# Altium PCB NBP2 Altera Cyclone PQ208 Rev1.02.PcbDoc (part 2 of 2)
Units mm, origin at the board's own origin, x right, y up, seen from the top; angles counter-clockwise.
Board outline 69 x 80.99 mm, 2 copper layers (Top Layer, Bottom Layer); 52 components, 189 nets, 558 pads, 192 vias.
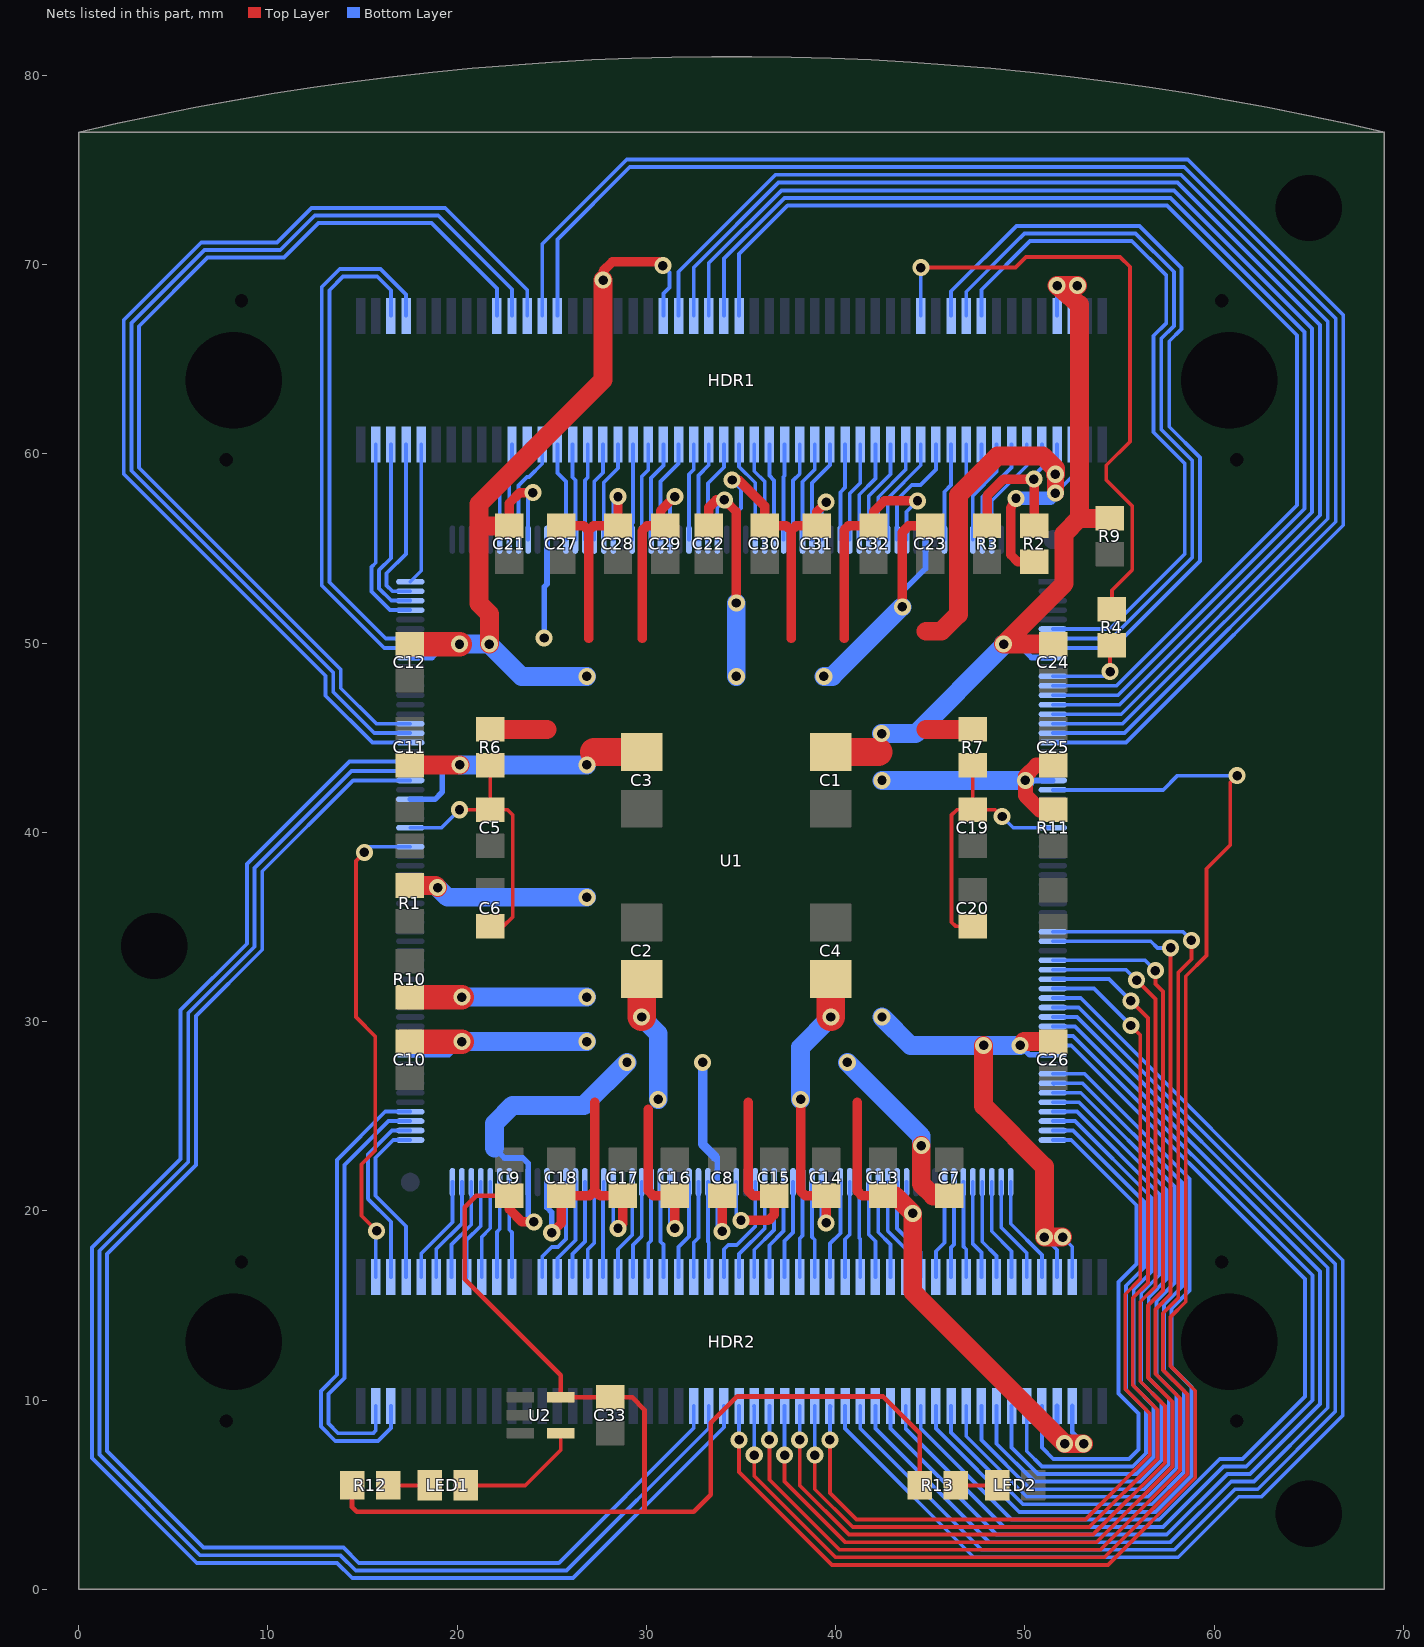
[diagram p2: the nets of this part, all layers, seen from the top]

## Via types
v1: diameter 0.9, hole 0.5, Top Layer to Bottom Layer, 192 vias

## Nets (pads, with @x,y where several pads share a name; then routed paths per layer and width w, separated by ;. In a path a pad name is that pad's centre, name@x,y a point inside that pad or via, vN(x,y) a via of type N, cw(c..) or ccw(c..) an arc to the next point about the centre after c; other vN are vias at no path point) (continued)
IO19: HDR2.45 U1.159 | length 81.4
  Bottom Layer w0.2: U1.159@17.525,42.75 14.505,42.75 9.703,37.948 9.703,33.803 6.198,30.297 6.198,22.431 1.5,17.734 1.5,7.314 6.598,2.216 13.989,2.216 14.805,1.4 25.375,1.4 32.5,8.525 HDR2.45@32.5,9.7
IO20: HDR2.47 U1.160 | length 83.8
  Bottom Layer w0.2: U1.160@17.525,43.25 14.421,43.25 9.296,38.125 9.296,33.962 5.791,30.457 5.791,22.591 1.1,17.9 1.1,7.13 6.426,1.803 13.836,1.803 14.64,1 25.781,1 33.3,8.519 HDR2.47@33.3,9.7
IO21: HDR2.49 U1.161 | length 86.1
  Bottom Layer w0.2: U1.161@17.525,43.75 14.311,43.75 8.89,38.329 8.89,34.121 5.385,30.616 5.385,22.75 0.7,18.065 0.7,6.945 6.242,1.403 13.659,1.403 14.462,0.6 26.127,0.6 34.1,8.573 HDR2.49@34.1,9.7
IO22: HDR2.51 U1.23 | length 80.7
  Top Layer w0.2: v1(34.9,7.9) 34.9,6.2 39.8,1.3 54.4,1.3 59,5.9 59,10.5 57.7,11.8 57.7,14.4 58.5,15.2 58.5,32.4 59.6,33.5 59.6,38.079 60.852,39.331 60.852,42.64 v1(61.214,43.002)
  Bottom Layer w0.2: v1(34.9,7.9) HDR2.51@34.9,9.7 ; U1.23@51.475,42.25 57.312,42.25 58.064,43.002 v1(61.214,43.002)
IO23: HDR2.53 U1.38 | length 67.1
  Top Layer w0.2: v1(35.7,7.1) 35.7,6 40,1.7 54.2,1.7 58.6,6.1 58.6,10.3 57.3,11.6 57.3,14.6 58.1,15.4 58.1,32.6 58.8,33.3 v1(58.8,34.3)
  Bottom Layer w0.2: HDR2.53@35.687,9.687 HDR2.53@35.7,9.7 v1(35.7,7.1) ; U1.38@51.475,34.75 58.35,34.75 v1(58.8,34.3)
IO24: HDR2.55 U1.39 | length 63.7
  Top Layer w0.2: v1(36.5,7.9) 36.5,5.8 40.2,2.1 54,2.1 58.2,6.3 58.2,10.1 56.9,11.4 56.9,14.8 57.7,15.6 v1(57.7,33.9)
  Bottom Layer w0.2: v1(36.5,7.9) HDR2.55@36.5,9.7 ; U1.39@51.475,34.25 56.65,34.25 57,33.9 v1(57.7,33.9)
IO25: HDR2.57 U1.41 | length 60.4
  Top Layer w0.2: v1(37.3,7.1) 37.3,5.7 40.5,2.5 53.8,2.5 57.8,6.5 57.8,9.9 56.5,11.2 56.5,15 57.3,15.8 57.3,31.6 56.9,32 v1(56.9,32.7)
  Bottom Layer w0.2: v1(37.3,7.1) HDR2.57@37.3,9.7 ; U1.41@51.475,33.25 56.35,33.25 v1(56.9,32.7)
IO26: HDR2.59 U1.42 | length 57.6
  Top Layer w0.2: v1(38.1,7.9) 38.1,5.5 40.7,2.9 53.6,2.9 57.4,6.7 57.4,9.7 56.1,11 56.1,15.2 56.9,16 56.9,31.2 v1(55.9,32.2)
  Bottom Layer w0.2: v1(38.1,7.9) HDR2.59@38.1,9.7 ; U1.42@51.475,32.75 55.35,32.75 v1(55.9,32.2)
IO27: HDR2.61 U1.43 | length 54.9
  Top Layer w0.2: v1(38.9,7.1) 38.9,5.3 40.9,3.3 53.4,3.3 57,6.9 57,9.5 55.7,10.8 55.7,15.4 56.5,16.2 56.5,30.2 v1(55.6,31.1)
  Bottom Layer w0.2: v1(38.9,7.1) HDR2.61@38.9,9.7 ; U1.43@51.475,32.25 54.45,32.25 v1(55.6,31.1)
IO28: HDR2.63 U1.44 | length 52.2
  Top Layer w0.2: v1(39.7,7.9) 39.7,5.1 41.1,3.7 53.2,3.7 56.6,7.1 56.6,9.3 55.3,10.6 55.3,15.6 56.1,16.4 56.1,29.3 v1(55.6,29.8)
  Bottom Layer w0.2: v1(39.7,7.9) HDR2.63@39.7,9.7 HDR2.63@39.725,9.675 ; U1.44@51.475,31.75 53.65,31.75 v1(55.6,29.8)
IO29: HDR2.65 U1.45 | length 62.7
  Bottom Layer w0.2: HDR2.65@40.5,9.7 40.5,8.5 47.3,1.7 58.1,1.7 61.3,4.9 62.5,4.9 66.8,9.2 66.8,17.4 52.95,31.25 U1.45@51.475,31.25
IO30: HDR2.67 U1.46 | length 60.3
  Bottom Layer w0.2: HDR2.67@41.3,9.7 41.3,8.5 47.7,2.1 57.9,2.1 61.1,5.3 62.3,5.3 66.4,9.4 66.4,17.2 52.85,30.75 U1.46@51.475,30.75
IO31: HDR2.69 U1.47 | length 57.9
  Bottom Layer w0.2: HDR2.69@42.1,9.7 42.1,8.5 48.1,2.5 57.7,2.5 60.9,5.7 62.1,5.7 66,9.6 66,17 52.75,30.25 U1.47@51.475,30.25
IO32: HDR2.71 U1.48 | length 55.6
  Bottom Layer w0.2: HDR2.71@42.9,9.7 42.9,8.5 48.5,2.9 57.5,2.9 60.7,6.1 61.9,6.1 65.6,9.8 65.6,16.8 52.65,29.75 U1.48@51.475,29.75
IO33: HDR2.73 U1.49 | length 53.2
  Bottom Layer w0.2: HDR2.73@43.7,9.7 43.7,8.5 48.9,3.3 57.3,3.3 60.5,6.5 61.7,6.5 65.2,10 65.2,16.6 52.55,29.25 U1.49@51.475,29.25
IO34: HDR2.75 U1.50 | length 50.8
  Bottom Layer w0.2: HDR2.75@44.5,9.7 44.5,8.5 49.3,3.7 57.1,3.7 60.3,6.9 61.5,6.9 64.8,10.2 64.8,16.4 52.45,28.75 U1.50@51.475,28.75
IO35: HDR2.77 U1.53 | length 43.4
  Bottom Layer w0.2: HDR2.77@45.3,9.7 45.3,8.5 49.7,4.1 56.9,4.1 58.8,6 58.8,10.7 57.75,11.75 57.75,14.85 58.7,15.8 58.7,21.7 53.15,27.25 U1.53@51.475,27.25
JIOA0: HDR1.3 U1.177 | length 10.3
  Bottom Layer w0.2: HDR1.3@15.7,60.5 15.7,54.252 15.475,54.027 15.475,52.725 16.45,51.75 U1.177@17.525,51.75
JIOA1: HDR1.5 U1.178 | length 9.8
  Bottom Layer w0.2: HDR1.5@16.5,60.5 16.5,54.486 15.875,53.861 15.875,52.891 16.516,52.25 U1.178@17.525,52.25
JIOA2: HDR1.7 U1.179 | length 9.2
  Bottom Layer w0.2: HDR1.7@17.3,60.5 17.3,54.721 16.275,53.696 16.275,53.056 16.581,52.75 U1.179@17.525,52.75
JIOA3: HDR1.9 U1.180 | length 7.5
  Bottom Layer w0.2: U1.180@17.525,53.25 18.1,53.825 HDR1.9@18.1,60.5
JIOB0: HDR1.83 U1.235 | length 5.4
  Bottom Layer w0.2: U1.235@46.75,55.475 46.75,57.872 47.7,58.822 HDR1.83@47.7,60.5
JIOB1: HDR1.85 U1.236 | length 5.5
  Bottom Layer w0.2: U1.236@47.25,55.475 47.25,57.806 48.5,59.056 HDR1.85@48.5,60.5
JIOB2: HDR1.87 U1.237 | length 5.7
  Bottom Layer w0.2: U1.237@47.75,55.475 47.75,57.74 49.3,59.291 HDR1.87@49.3,60.5
JIOB3: HDR1.89 U1.238 | length 5.8
  Bottom Layer w0.2: U1.238@48.25,55.475 48.25,57.525 50.1,59.375 HDR1.89@50.1,60.5
KBCLOCK: HDR1.22 U1.164 | length 54.4
  Bottom Layer w0.2: U1.164@17.525,45.25 15.625,45.25 13.45,47.425 13.45,48.447 2.788,59.109 2.788,66.919 6.644,70.775 10.65,70.775 12.475,72.6 19,72.6 22.9,68.7 HDR1.22@22.9,67.3
KBDATA: HDR1.24 U1.163 | length 56.7
  Bottom Layer w0.2: U1.163@17.525,44.75 15.525,44.75 13.05,47.225 13.05,48.281 2.388,58.943 2.388,67.085 6.478,71.175 10.484,71.175 12.309,73 19.375,73 23.7,68.675 HDR1.24@23.7,67.3
LCD_BCKL: HDR2.22 U1.114 | length 5.2
  Bottom Layer w0.2: U1.114@22.8,21.475 U1.114@22.75,21.525 22.75,19.006 22.9,18.856 HDR2.22@22.9,16.5
LCD_E: HDR2.26 U1.108 | length 5.7
  Bottom Layer w0.2: HDR2.26@24.5,16.5 24.5,17.6 25,18.1 25.325,18.1 25.75,18.525 U1.108@25.75,21.525
LED0: HDR2.60 U1.83 | length 5.1
  Bottom Layer w0.2: HDR2.60@38.1,16.5 38.1,18.55 38.25,18.7 U1.83@38.25,21.525
LED1: HDR2.62 U1.82 | length 5.1
  Bottom Layer w0.2: U1.82@38.75,21.525 38.75,18.625 38.9,18.475 HDR2.62@38.9,16.5
LED2: HDR2.64 U1.79 | length 5.3
  Bottom Layer w0.2: HDR2.64@39.7,16.5 39.7,18.275 40.25,18.825 U1.79@40.25,21.525
LED3: HDR2.66 U1.78 | length 5.1
  Bottom Layer w0.2: HDR2.66@40.5,16.5 40.5,18.509 40.75,18.759 U1.78@40.75,21.525
LED4: HDR2.68 U1.77 | length 5
  Bottom Layer w0.2: U1.77@41.25,21.525 41.25,18.575 41.3,18.525 HDR2.68@41.3,16.5
LED5: HDR2.70 U1.76 | length 5.2
  Bottom Layer w0.2: U1.76@41.75,21.525 41.75,18.75 42.1,18.4 HDR2.70@42.1,16.5
LED6: HDR2.72 U1.75 | length 5.3
  Bottom Layer w0.2: U1.75@42.25,21.525 42.25,18.875 42.9,18.225 HDR2.72@42.9,16.5
LED7: HDR2.74 U1.74 | length 5.4
  Bottom Layer w0.2: U1.74@42.75,21.525 42.75,18.95 43.7,18 HDR2.74@43.7,16.5
MOUSECLOCK: HDR1.26 U1.18 | length 82.6
  Bottom Layer w0.2: HDR1.26@24.5,67.3 24.5,71.1 28.959,75.559 58.604,75.559 66.825,67.338 66.825,56.233 55.342,44.75 U1.18@51.475,44.75
MOUSEDATA: HDR1.28 U1.17 | length 80.4
  Bottom Layer w0.2: HDR1.28@25.3,67.3 25.3,71.334 29.124,75.159 58.42,75.159 66.425,67.154 66.425,56.417 55.258,45.25 U1.17@51.475,45.25
NetC5_1: C5.1 C6.1 R6.2 U1.154 | length 15
  Top Layer w0.2: v1(20.125,41.2) C5.1@21.75,41.2 ; C6.1@21.75,35.05 22.452,35.05 22.936,35.535 22.936,40.919 22.656,41.2 C5.1@21.75,41.2 ; R6.2@21.75,43.55 C5.1@21.75,41.2
  Bottom Layer w0.2: U1.154@17.525,40.25 19.175,40.25 v1(20.125,41.2)
NetC19_2: C19.2 C20.2 R7.2 U1.27 | length 15.1
  Top Layer w0.2: C20.2@47.25,35.05 46.332,35.05 46.126,35.255 46.126,40.919 46.407,41.2 48.437,41.2 v1(48.793,40.843) ; C19.2@47.25,41.2 R7.2@47.25,43.55
  Bottom Layer w0.2: v1(48.793,40.843) 49.387,40.25 U1.27@51.475,40.25
NetLED1_1: LED1.1 R12.2 | length 2.2
  Top Layer w0.2: R12.2@16.35,5.5 LED1.1@18.55,5.5
NetLED1_2: LED1.2 U2.4 | length 6.7
  Top Layer w0.2: LED1.2@20.45,5.5 23.6,5.5 25.475,7.375 U2.4@25.475,8.25
NetLED2_1: LED2.1 R13.2 | length 2.2
  Top Layer w0.2: R13.2@46.35,5.5 LED2.1@48.55,5.5
NEXUS_TCK: HDR1.82 U1.7 | length 39.6
  Bottom Layer w0.2: HDR1.82@46.9,67.3 46.9,68.575 49.467,71.142 49.975,71.65 55.85,71.65 57.875,69.625 57.875,66.761 57.201,66.087 57.201,61.309 58.846,59.663 58.846,54.528 54.568,50.25 U1.7@51.475,50.25
NEXUS_TDI: HDR1.84 U1.6 | length 37.3
  Bottom Layer w0.2: HDR1.84@47.7,67.3 47.7,68.675 50.275,71.25 55.65,71.25 57.475,69.425 57.475,66.927 56.794,66.246 56.794,61.149 58.445,59.498 58.445,54.712 54.483,50.75 U1.6@51.475,50.75
NEXUS_TDO: HDR1.76 R4.2 | length 33.7
  Top Layer w0.2: v1(44.5,69.85) 49.507,69.85 50.066,70.409 55.033,70.409 55.55,69.892 55.55,60.65 54.3,59.4 54.3,58.628 55.677,57.252 55.677,53.877 54.6,52.8 R4.2@54.6,51.8
  Bottom Layer w0.2: HDR1.76@44.5,67.3 v1(44.5,69.85)
NEXUS_TDO#: R4.1 U1.11 | length 4.9
  Top Layer w0.2: v1(54.5,48.5) R4.1@54.5,50.3
  Bottom Layer w0.2: U1.11@51.475,48.25 54.25,48.25 v1(54.5,48.5)
NEXUS_TMS: HDR1.80 U1.8 | length 41.9
  Bottom Layer w0.2: HDR1.80@46.1,67.3 46.1,68.6 49.55,72.05 56.05,72.05 58.275,69.825 58.275,66.595 57.633,65.953 57.633,61.443 59.258,59.817 59.258,54.347 54.661,49.75 U1.8@51.475,49.75
RAM0_DATA0: HDR2.42 U1.98 | length 5.1
  Bottom Layer w0.2: U1.98@30.75,21.525 30.75,18.375 30.9,18.225 HDR2.42@30.9,16.5
RAM0_DATA1: HDR2.40 U1.99 | length 5.1
  Bottom Layer w0.2: HDR2.40@30.1,16.5 30.1,18.275 30.25,18.425 U1.99@30.25,21.525
RAM0_DATA2: HDR2.38 U1.100 | length 5.2
  Bottom Layer w0.2: HDR2.38@29.3,16.5 29.3,18.209 29.75,18.659 U1.100@29.75,21.525
RAM0_DATA3: HDR2.36 U1.101 | length 5.3
  Bottom Layer w0.2: HDR2.36@28.5,16.5 28.5,17.975 29.25,18.725 U1.101@29.25,21.525
RAM0_DATA4: HDR2.34 U1.104 | length 5
  Bottom Layer w0.2: HDR2.34@27.7,16.5 27.7,20.575 27.75,20.625 U1.104@27.75,21.525
RAM0_DATA5: HDR2.32 U1.105 | length 5.2
  Bottom Layer w0.2: HDR2.32@26.9,16.5 26.9,17.969 27.25,18.319 U1.105@27.25,21.525
RAM0_DATA6: HDR2.30 U1.106 | length 5.3
  Bottom Layer w0.2: HDR2.30@26.1,16.5 26.1,17.734 26.75,18.384 U1.106@26.75,21.525
RAM0_DATA7: HDR2.28 U1.107 | length 5.4
  Bottom Layer w0.2: HDR2.28@25.3,16.5 25.3,17.5 26.25,18.45 U1.107@26.25,21.525
RAM0_OE: HDR1.41 U1.202 | length 5.3
  Bottom Layer w0.2: U1.202@30.25,55.475 30.25,58.734 30.9,59.384 HDR1.41@30.9,60.5
RAM0_WE: HDR1.79 U1.233 | length 5.2
  Bottom Layer w0.2: U1.233@45.75,55.475 45.75,58.003 46.1,58.353 HDR1.79@46.1,60.5
RAM1_DATA0: HDR1.45 U1.206 | length 5.1
  Bottom Layer w0.2: U1.206@32.25,55.475 32.25,58.925 32.5,59.175 HDR1.45@32.5,60.5
RAM1_DATA1: HDR1.49 U1.208 | length 5.4
  Bottom Layer w0.2: U1.208@33.25,55.475 33.25,58.45 34.1,59.3 HDR1.49@34.1,60.5
RAM1_DATA2: HDR1.53 U1.214 | length 5.3
  Bottom Layer w0.2: HDR1.53@35.7,60.5 35.7,59.091 36.25,58.541 U1.214@36.25,55.475
RAM1_DATA3: HDR1.57 U1.216 | length 5
  Bottom Layer w0.2: U1.216@37.25,55.475 37.25,58.8 37.3,58.85 HDR1.57@37.3,60.5
RAM1_DATA4: HDR1.55 U1.215 | length 5.1
  Bottom Layer w0.2: HDR1.55@36.5,60.5 36.5,58.856 36.75,58.606 U1.215@36.75,55.475
RAM1_DATA5: HDR1.51 U1.213 | length 5.4
  Bottom Layer w0.2: HDR1.51@34.9,60.5 34.9,59.325 35.75,58.475 U1.213@35.75,55.475
RAM1_DATA6: HDR1.47 U1.207 | length 5.3
  Bottom Layer w0.2: U1.207@32.75,55.475 32.75,58.859 33.3,59.409 HDR1.47@33.3,60.5
RAM1_DATA7: HDR1.43 U1.203 | length 5.4
  Bottom Layer w0.2: U1.203@30.75,55.475 30.75,58.55 31.7,59.5 HDR1.43@31.7,60.5
RAM1_OE: HDR1.39 U1.201 | length 5.2
  Bottom Layer w0.2: U1.201@29.75,55.475 29.75,58.8 30.1,59.15 HDR1.39@30.1,60.5
RAM1_WE: HDR1.61 U1.218 | length 5.3
  Bottom Layer w0.2: U1.218@38.25,55.475 38.25,58.534 38.9,59.184 HDR1.61@38.9,60.5
RAM_ADDR0: HDR1.21 U1.186 | length 5.3
  Bottom Layer w0.2: U1.186@22.25,55.475 22.25,58.639 22.9,59.289 HDR1.21@22.9,60.5
RAM_ADDR1: HDR1.25 U1.188 | length 5.6
  Bottom Layer w0.2: U1.188@23.25,55.475 23.25,58.338 23.697,58.786 23.799,58.786 24.5,59.487 HDR1.25@24.5,60.5
RAM_ADDR2: HDR1.29 U1.194 | length 5.1
  Bottom Layer w0.2: HDR1.29@26.1,60.5 26.1,58.766 26.25,58.616 U1.194@26.25,55.475
RAM_ADDR3: HDR1.33 U1.196 | length 5.2
  Bottom Layer w0.2: U1.196@27.25,55.475 27.25,58.557 27.7,59.007 HDR1.33@27.7,60.5
RAM_ADDR4: HDR1.65 U1.222 | length 5.1
  Bottom Layer w0.2: U1.222@40.25,55.475 40.25,57.978 40.5,58.228 HDR1.65@40.5,60.5
RAM_ADDR5: HDR1.69 U1.224 | length 5.4
  Bottom Layer w0.2: U1.224@41.25,55.475 41.25,57.847 42.1,58.697 HDR1.69@42.1,60.5
RAM_ADDR6: HDR1.73 U1.226 | length 5.6
  Bottom Layer w0.2: U1.226@42.25,55.475 42.25,57.716 43.7,59.166 HDR1.73@43.7,60.5
RAM_ADDR7: HDR1.77 U1.228 | length 6.1
  Bottom Layer w0.2: U1.228@43.25,55.475 43.25,57.58 44.025,58.355 44.48,58.355 45.3,59.175 HDR1.77@45.3,60.5
RAM_ADDR8: HDR1.75 U1.227 | length 5.7
  Bottom Layer w0.2: U1.227@42.75,55.475 42.75,57.65 44.5,59.4 HDR1.75@44.5,60.5
RAM_ADDR9: HDR1.71 U1.225 | length 5.5
  Bottom Layer w0.2: U1.225@41.75,55.475 41.75,57.781 42.9,58.931 HDR1.71@42.9,60.5
RAM_ADDR10: HDR1.67 U1.223 | length 5.3
  Bottom Layer w0.2: U1.223@40.75,55.475 40.75,57.913 41.3,58.463 HDR1.67@41.3,60.5
RAM_ADDR11: HDR1.63 U1.219 | length 5.4
  Bottom Layer w0.2: U1.219@38.75,55.475 38.75,58.469 39.7,59.419 HDR1.63@39.7,60.5
RAM_ADDR12: HDR1.59 U1.217 | length 5.2
  Bottom Layer w0.2: U1.217@37.75,55.475 37.75,58.6 38.1,58.95 HDR1.59@38.1,60.5
RAM_ADDR13: HDR1.35 U1.197 | length 5.3
  Bottom Layer w0.2: U1.197@27.75,55.475 27.75,58.491 28.5,59.241 HDR1.35@28.5,60.5
RAM_ADDR14: HDR1.31 U1.195 | length 5.1
  Bottom Layer w0.2: U1.195@26.75,55.475 26.75,58.6 26.9,58.75 HDR1.31@26.9,60.5
RAM_ADDR15: HDR1.27 U1.193 | length 5.2
  Bottom Layer w0.2: HDR1.27@25.3,60.5 25.3,59 25.75,58.55 U1.193@25.75,55.475
RAM_ADDR16: HDR1.23 U1.187 | length 5.4
  Bottom Layer w0.2: U1.187@22.75,55.475 22.75,58.486 23.7,59.436 HDR1.23@23.7,60.5
RAM_CS: HDR1.37 U1.200 | length 5
  Bottom Layer w0.2: U1.200@29.25,55.475 29.25,56.325 29.3,56.375 HDR1.37@29.3,60.5
RED0: HDR1.6 U1.174 | length 26.1
  Bottom Layer w0.2: HDR1.6@16.5,67.3 16.5,68.65 15.775,69.375 13.975,69.375 13.25,68.65 13.25,53.225 16.225,50.25 U1.174@17.525,50.25
RED1: HDR1.8 U1.173 | length 28.3
  Bottom Layer w0.2: HDR1.8@17.3,67.3 17.3,68.425 15.95,69.775 13.8,69.775 12.85,68.825 12.85,53.05 16.15,49.75 U1.173@17.525,49.75
REF_CLK: HDR2.4 U1.152 | length 26.3
  Top Layer w0.2: v1(15.1,38.95) 14.65,38.5 14.65,30.245 15.672,29.224 15.672,23.19 14.948,22.466 14.948,19.752 v1(15.75,18.95)
  Bottom Layer w0.2: v1(15.1,38.95) 15.35,39.25 U1.152@17.525,39.25 ; HDR2.4@15.7,16.5 15.7,18.9 v1(15.75,18.95)
SCL: HDR2.5 U1.124 | length 24.8
  Bottom Layer w0.2: HDR2.5@16.5,9.7 16.5,8.525 15.821,7.846 13.561,7.846 12.8,8.606 12.8,10.493 13.65,11.343 13.65,22.7 16.2,25.25 U1.124@17.525,25.25
SDA: HDR2.3 U1.123 | length 22.5
  Bottom Layer w0.2: HDR2.3@15.7,9.7 15.7,8.4 15.55,8.25 13.722,8.25 13.2,8.772 13.2,10.328 14.05,11.178 14.05,22.425 16.375,24.75 U1.123@17.525,24.75
SP0: HDR2.79 U1.54 | length 41.2
  Bottom Layer w0.2: HDR2.79@46.1,9.7 46.1,8.3 49.9,4.5 56.7,4.5 58.4,6.2 58.4,10.5 57.35,11.55 57.35,15.05 58.3,16 58.3,21.5 53.05,26.75 U1.54@51.475,26.75 U1.54@51.525,26.7
SP1: HDR2.81 U1.55 | length 38.9
  Bottom Layer w0.2: HDR2.81@46.9,9.7 46.9,8.1 50.1,4.9 56.5,4.9 58,6.4 58,10.3 56.95,11.35 56.95,15.25 57.9,16.2 57.9,21.3 52.95,26.25 U1.55@51.475,26.25
SP2: HDR2.83 U1.56 | length 36.6
  Bottom Layer w0.2: HDR2.83@47.7,9.7 47.7,7.9 50.3,5.3 56.3,5.3 57.6,6.6 57.6,10.1 56.55,11.15 56.55,15.45 57.5,16.4 57.5,21.1 52.85,25.75 U1.56@51.475,25.75
SP3: HDR2.85 U1.57 | length 34.3
  Bottom Layer w0.2: HDR2.85@48.5,9.7 48.5,7.7 50.5,5.7 56.1,5.7 57.2,6.8 57.2,9.9 56.15,10.95 56.15,15.65 57.1,16.6 57.1,20.9 52.75,25.25 U1.57@51.475,25.25
SP4: HDR2.87 U1.58 | length 32.1
  Bottom Layer w0.2: HDR2.87@49.3,9.7 49.3,7.5 50.7,6.1 55.9,6.1 56.8,7 56.8,9.7 55.75,10.75 55.75,15.85 56.7,16.8 56.7,20.7 52.65,24.75 U1.58@51.475,24.75
SP5: HDR2.89 U1.59 | length 29.8
  Bottom Layer w0.2: HDR2.89@50.1,9.7 50.1,7.3 50.9,6.5 55.7,6.5 56.4,7.2 56.4,9.5 55.35,10.55 55.35,16.05 56.3,17 56.3,20.5 52.55,24.25 U1.59@51.475,24.25
SP6: HDR2.91 U1.60 | length 27.3
  Bottom Layer w0.2: HDR2.91@50.9,9.7 50.9,7.5 51.5,6.9 55.5,6.9 56,7.4 56,9.3 54.95,10.35 54.95,16.25 55.9,17.2 55.9,20.3 52.45,23.75 U1.60@51.475,23.75
SP7: HDR2.92 U1.61 | length 5.7
  Bottom Layer w0.2: U1.61@49.25,21.525 49.25,19.325 50.9,17.675 HDR2.92@50.9,16.5
SP8: HDR2.90 U1.62 | length 5.6
  Bottom Layer w0.2: U1.62@48.75,21.525 48.75,19.125 50.1,17.775 HDR2.90@50.1,16.5
SP9: HDR2.88 U1.63 | length 5.5
  Bottom Layer w0.2: U1.63@48.25,21.525 48.25,18.925 49.3,17.875 HDR2.88@49.3,16.5
SP10: HDR2.86 U1.64 | length 5.3
  Bottom Layer w0.2: U1.64@47.75,21.525 47.75,18.375 48.5,17.625 HDR2.86@48.5,16.5
SP11: HDR2.84 U1.65 | length 5.2
  Bottom Layer w0.2: U1.65@47.25,21.525 47.25,18.25 47.7,17.8 HDR2.84@47.7,16.5
SP12: HDR2.82 U1.66 | length 5.1
  Bottom Layer w0.2: U1.66@46.75,21.525 46.75,18.125 46.9,17.975 HDR2.82@46.9,16.5
SP13: HDR2.80 U1.67 | length 5.1
  Bottom Layer w0.2: HDR2.80@46.1,16.5 46.1,18.075 46.25,18.225 U1.67@46.25,21.525
SP14: HDR2.78 U1.68 | length 5.2
  Bottom Layer w0.2: HDR2.78@45.3,16.5 45.3,17.875 45.75,18.325 U1.68@45.75,21.525
SP15: HDR2.76 U1.73 | length 5.5
  Bottom Layer w0.2: U1.73@43.25,21.525 43.25,19.075 44.5,17.825 HDR2.76@44.5,16.5
SPI_CLK: HDR1.46 U1.15 | length 69.2
  Bottom Layer w0.2: HDR1.46@32.5,67.3 32.5,69.859 36.986,74.346 58.064,74.346 65.6,66.81 65.6,56.761 55.089,46.25 U1.15@51.475,46.25
SPI_DIN: HDR1.44 U1.16 | length 71.4
  Bottom Layer w0.2: HDR1.44@31.7,67.3 31.7,69.625 36.827,74.752 58.242,74.752 66,66.994 66,56.577 55.173,45.75 U1.16@51.475,45.75
SPI_DOUT: HDR1.50 U1.13 | length 64.7
  Bottom Layer w0.2: HDR1.50@34.1,67.3 34.1,70.328 37.299,73.527 57.69,73.527 64.775,66.441 64.775,57.104 54.921,47.25 U1.13@51.475,47.25
SPI_MODE: HDR1.52 U1.12 | length 62.5
  Bottom Layer w0.2: HDR1.52@34.9,67.3 34.9,70.562 37.464,73.127 57.517,73.127 64.375,66.269 64.375,57.288 54.837,47.75 U1.12@51.475,47.75
SPI_SEL: HDR1.48 U1.14 | length 66.9
  Bottom Layer w0.2: HDR1.48@33.3,67.3 33.3,70.094 37.133,73.927 57.874,73.927 65.175,66.626 65.175,56.92 55.005,46.75 U1.14@51.475,46.75
SW0: HDR2.44 U1.95 | length 5.3
  Bottom Layer w0.2: HDR2.44@31.7,16.5 31.7,18.1 32.25,18.65 U1.95@32.25,21.525
SW1: HDR2.46 U1.94 | length 5.1
  Bottom Layer w0.2: HDR2.46@32.5,16.5 32.5,18.334 32.75,18.584 U1.94@32.75,21.525
SW2: HDR2.48 U1.93 | length 5
  Bottom Layer w0.2: U1.93@33.25,21.525 33.25,18.375 33.3,18.325 HDR2.48@33.3,16.5
SW3: HDR2.50 U1.88 | length 6
  Bottom Layer w0.2: HDR2.50@34.1,16.5 34.1,17.975 34.325,18.2 34.775,18.2 35.75,19.175 U1.88@35.75,21.525
SW4: HDR2.52 U1.87 | length 5.6
  Bottom Layer w0.2: HDR2.52@34.9,16.5 34.9,17.725 36.25,19.075 U1.87@36.25,21.525
SW5: HDR2.54 U1.86 | length 5.5
  Bottom Layer w0.2: HDR2.54@35.7,16.5 35.7,17.95 36.75,19 U1.86@36.75,21.525
SW6: HDR2.56 U1.85 | length 5.3
  Bottom Layer w0.2: HDR2.56@36.5,16.5 36.5,18.184 37.25,18.934 U1.85@37.25,21.525
SW7: HDR2.58 U1.84 | length 5.2
  Bottom Layer w0.2: HDR2.58@37.3,16.5 37.3,18.419 37.75,18.869 U1.84@37.75,21.525
SWC0: HDR2.18 U1.116 | length 5.2
  Bottom Layer w0.2: HDR2.18@21.3,16.5 21.3,18.633 21.75,19.083 U1.116@21.75,21.525
SWC1: HDR2.16 U1.117 | length 5.3
  Bottom Layer w0.2: HDR2.16@20.5,16.5 20.5,18.46 21.25,19.21 U1.117@21.25,21.525
SWC2: HDR2.14 U1.118 | length 5.5
  Bottom Layer w0.2: HDR2.14@19.7,16.5 19.7,18.226 20.75,19.276 U1.118@20.75,21.525
SWC3: HDR2.6 U1.122 | length 9.7
  Bottom Layer w0.2: HDR2.6@16.5,16.5 16.5,19.431 15.291,20.64 15.291,22.981 16.559,24.25 U1.122@17.525,24.25
SWR0: HDR2.20 U1.115 | length 5.1
  Bottom Layer w0.2: HDR2.20@22.1,16.5 22.1,18.889 22.25,19.039 U1.115@22.25,21.525
SWR1: HDR2.12 U1.119 | length 5.6
  Bottom Layer w0.2: HDR2.12@18.9,16.5 18.9,17.991 20.25,19.341 U1.119@20.25,21.525
SWR2: HDR2.10 U1.120 | length 5.7
  Bottom Layer w0.2: HDR2.10@18.1,16.5 18.1,17.757 19.75,19.407 U1.120@19.75,21.525
SWR3: HDR2.8 U1.121 | length 9.2
  Bottom Layer w0.2: HDR2.8@17.3,16.5 17.3,19.197 15.691,20.806 15.691,22.816 16.625,23.75 U1.121@17.525,23.75
TEST: HDR1.81 U1.234 | length 5.3
  Bottom Layer w0.2: U1.234@46.25,55.475 46.25,57.938 46.9,58.588 HDR1.81@46.9,60.5
VCC: C1.1 C3.1 C7.1 C8.1 C9.1 C10.1 C11.1 C12.1 C21.2 C22.2 C23.2 C24.2 C25.2 C26.2 C33.1 HDR1.34 HDR1.42 HDR1.94 HDR1.96 HDR2.94 HDR2.96 R1.1 R9.1 R10.1 R11.1 R12.1 R13.1 U1.9 U1.22 U1.51 U1.70 U1.92 U1.112 U1.130 U1.157 U1.172 U1.189 U1.209 U1.231 U2.5 | length 317.7
  Top Layer w0.25: R12.1@14.45,5.5 14.45,4.35 14.7,4.1 32.5,4.1 33.4,5 33.4,8.8 34.8,10.2 42.5,10.2 44.45,8.25 R13.1@44.45,5.5 ; C9.1@22.75,20.8 21,20.8 20.4,20.2 20.4,16.4 25.475,11.325 U2.5@25.475,10.15 29.25,10.15 29.9,9.5 29.9,4.1
  Top Layer w0.5: C9.1@22.75,20.8 22.75,20.1 23.425,19.425 v1(24.05,19.425) ; C21.2@22.75,56.2 22.75,57.396 23.317,57.963 v1(24.003,57.963) ; v1(27.711,69.19) 27.711,69.667 28.194,70.15 30.675,70.15 v1(30.875,69.95) ; C22.2@33.3,56.2 33.3,57.175 33.7,57.575 v1(34.125,57.575) 34.75,56.95 v1(34.75,52.125) ; v1(34,18.925) C8.1@34,20.8 ; v1(43.525,51.925) 43.525,55.875 43.85,56.2 C23.2@45,56.2
  Top Layer w0.8: R11.1@51.5,41.2 50.775,41.2 50.025,41.95 50.025,42.975 50.6,43.55 C25.2@51.5,43.55
  Top Layer w1: R1.1@17.5,37.2 18.858,37.2 v1(18.974,37.084) ; C11.1@17.5,43.55 17.525,43.575 v1(20.15,43.575) ; 21.15,56.2 C21.2@22.75,56.2 ; v1(21.7,49.95) 21.7,51.55 21.15,52.1 21.15,57.353 27.711,63.915 v1(27.711,69.19) ; v1(44.525,23.45) 44.525,21.425 45.15,20.8 C7.1@46,20.8 ; v1(47.821,28.746) 47.821,25.554 51.029,22.346 v1(51.029,18.618) v1(51.994,18.618) ; v1@49.95,28.95 C26.2@51.5,28.95 ; C24.2@51.5,49.95 v1(48.875,49.95) 52.07,53.145 52.07,54.559 52.07,55.778 52.883,56.591 ; v1(52.775,68.9) v1(51.7,68.9) 52.883,67.894 52.883,56.591 ; R9.1@54.483,56.601 52.883,56.591
  Top Layer w1.3: C10.1@17.5,28.95 v1(20.25,28.95) ; R10.1@17.5,31.3 v1(20.25,31.3) ; C12.1@17.5,49.95 v1(20.125,49.95)
  Top Layer w1.5: 27.25,44.25 C3.1@29.75,44.25 ; C1.1@39.75,44.25 42.25,44.25
  Bottom Layer w0.2: U1.189@23.75,55.475 23.75,57.71 v1(24.003,57.963) ; HDR1.34@27.7,67.3 27.7,69.325 v1(27.711,69.19) ; v1(30.875,69.95) 31.225,69.6 31.225,68.8 30.9,68.475 HDR1.42@30.9,67.3 ; U1.92@33.75,21.525 33.75,19.175 v1(34,18.925) ; U1.209@33.75,55.475 33.75,57.2 v1(34.125,57.575) ; v1(51.029,18.618) 51.7,17.947 HDR2.94@51.7,16.5 ; HDR1.94@51.7,67.3 v1(51.7,68.9) ; v1(51.994,18.618) 52.5,18.112 HDR2.96@52.5,16.5 ; HDR1.96@52.5,67.3 52.5,68.625 v1(52.775,68.9)
  Bottom Layer w0.3: U1.130@17.525,28.25 19.55,28.25 v1(20.25,28.95) ; U1.157@17.525,41.75 18.825,41.75 19.21,42.135 19.21,43.235 19.55,43.575 v1(20.15,43.575) ; U1.172@17.525,49.25 18.675,49.25 19.375,49.95 v1(20.125,49.95) ; 21.977,23.327 22.505,22.8 23.475,22.8 23.75,22.525 U1.112@23.75,21.525 23.75,19.725 v1(24.05,19.425) ; 33.65,22.839 33.75,22.739 U1.92@33.75,21.525 ; v1(43.525,51.925) 43.525,52.725 44.75,53.95 U1.231@44.75,55.475 ; v1(44.525,23.45) 44.75,23.225 U1.70@44.75,21.525 ; v1(48.875,49.95) 49.65,49.95 50.35,49.25 U1.9@51.475,49.25 ; v1(49.75,28.75) 50.25,28.25 U1.51@51.475,28.25 ; v1(50.025,42.75) U1.22@51.475,42.75
  Bottom Layer w0.5: v1(32.975,27.85) 32.975,23.514 33.65,22.839
  Bottom Layer w1: v1(18.974,37.084) 19.482,36.576 v1@26.848,36.576 ; v1(20.125,49.95) v1(21.7,49.95) 23.4,48.25 v1(26.85,48.25) ; v1(20.15,43.575) v1(26.85,43.575) ; v1(20.25,28.95) v1(26.85,28.95) ; v1(20.25,31.3) v1(26.85,31.3) ; 21.977,23.327 21.977,24.627 22.925,25.575 26.7,25.575 v1(28.975,27.85) ; v1(34.75,48.25) v1(34.75,52.125) ; v1(39.375,48.25) 39.825,48.25 v1@43.5,51.925 ; v1(40.625,27.85) 44.525,23.95 v1(44.525,23.45) ; v1(42.425,45.225) 44.225,45.225 48.75,49.75 v1(48.875,49.95) ; v1(42.45,30.25) 43.95,28.75 v1(47.821,28.746) v1(49.75,28.75) ; v1(42.45,42.75) v1(50.025,42.75)
  other v1: 26.85,36.576
VCCINT: C2.1 C4.1 C13.1 C14.1 C15.1 C16.1 C17.1 C18.1 C27.2 C28.2 C29.2 C30.2 C31.2 C32.2 HDR1.93 HDR1.95 HDR2.93 HDR2.95 R2.1 R6.1 R7.1 U1.72 U1.81 U1.90 U1.97 U1.103 U1.110 U1.191 U1.198 U1.204 U1.211 U1.220 U1.229 | length 187.2
  Top Layer w0.5: v1(25,18.85) 25.5,19.35 C18.1@25.5,20.8 27,20.8 27.275,21.075 ; C27.2@25.5,56.2 26.7,56.2 26.95,55.95 ; 26.95,50.25 26.95,55.95 ; 27.275,25.75 27.275,21.075 ; v1(28.5,19.075) 28.75,19.325 C17.1@28.75,20.8 27.55,20.8 27.275,21.075 ; v1(28.5,57.75) C28.2@28.5,56.2 27.2,56.2 26.95,55.95 ; 29.775,50.25 29.775,55.95 30.025,56.2 C29.2@30.75,56.2 ; 30.1,25.375 30.1,21.075 30.375,20.8 C16.1@31.5,20.8 v1(31.5,19.075) ; C29.2@31,56.2 C29.2@30.75,56.2 ; v1(31.5,57.75) 30.75,57 C29.2@30.75,56.2 ; v1(34.525,58.625) 34.875,58.625 36.25,57.25 C30.2@36.25,56.2 37.4,56.2 37.65,55.95 ; v1(35,19.5) 36.45,19.5 36.75,19.8 C15.1@36.75,20.8 35.65,20.8 35.375,21.075 35.375,25.75 ; 37.65,50.25 37.65,55.95 ; v1(38.15,25.9) 38.15,21.05 38.4,20.8 C14.1@39.5,20.8 v1(39.5,19.375) ; v1(39.5,57.45) 39,56.95 C31.2@39,56.2 37.9,56.2 37.65,55.95 ; 40.45,50.25 40.45,55.975 40.675,56.2 C32.2@42,56.2 42,56.95 42.575,57.525 v1(44.325,57.525) ; 41.15,25.75 41.15,21.05 41.4,20.8 C13.1@42.5,20.8 ; v1(49.53,57.658) 49.25,57.15 49.25,54.675 49.625,54.3 R2.1@50.5,54.3
  Top Layer w0.9: v1(51.613,57.928) v1(51.613,58.928)
  Top Layer w1: R6.1@21.75,45.45 24.75,45.45 ; C13.1@42.5,20.8 43.15,20.8 v1(44.075,19.875) 44.075,15.725 v1(52.1,7.7) v1(53.1,7.7) ; 44.775,45.45 R7.1@47.25,45.45 ; 44.775,50.633 45.593,50.633 46.482,51.522 46.482,57.822 48.56,59.9 50.946,59.9 51.613,59.233 v1(51.613,58.928)
  Top Layer w1.5: v1(29.75,30.25) C2.1@29.75,32.25 ; v1(39.75,30.25) C4.1@39.75,32.25
  Bottom Layer w0.2: U1.103@28.25,21.525 28.25,19.325 v1(28.5,19.075) ; U1.198@28.25,55.475 28.25,57.5 v1(28.5,57.75) ; U1.97@31.25,21.525 31.25,19.325 v1(31.5,19.075) ; U1.204@31.25,55.475 31.25,57.5 v1(31.5,57.75) ; v1(34.525,58.625) 35,58.15 35,57.15 34.75,56.9 U1.211@34.75,55.475 ; U1.90@34.75,21.525 34.75,19.75 v1(35,19.5) ; U1.81@39.25,21.525 39.25,19.625 v1(39.5,19.375) ; U1.220@39.25,55.475 39.25,57.2 v1(39.5,57.45) ; U1.72@43.75,21.525 43.75,20.225 v1(44.075,19.875) ; U1.229@43.75,55.475 43.75,56.95 v1(44.325,57.525) ; v1(51.613,57.928) 52.5,58.815 HDR1.95@52.5,60.5 ; HDR1.93@51.7,60.5 v1@51.714,58.928
  Bottom Layer w0.25: HDR2.93@51.7,9.7 51.7,8.1 v1(52.1,7.7) ; HDR2.95@52.5,9.7 52.5,8.3 v1(53.1,7.7)
  Bottom Layer w0.3: v1(24.6,50.275) 24.6,52.978 24.75,53.128 U1.191@24.75,55.475 ; U1.110@24.75,21.525 24.75,20.175 25,19.925 v1(25,18.85)
  Bottom Layer w0.7: v1(49.53,57.658) 51.343,57.658 v1(51.613,57.928)
  Bottom Layer w1: v1(29.75,30.25) 30.625,29.375 v1(30.625,25.9) ; v1(38.15,25.9) 38.15,28.65 v1(39.75,30.25)
VDRIVE: HDR1.20 U1.165 | length 52
  Bottom Layer w0.2: U1.165@17.525,45.75 15.725,45.75 13.85,47.625 13.85,48.612 3.188,59.275 3.188,66.753 6.809,70.375 10.85,70.375 12.675,72.2 18.65,72.2 22.1,68.75 HDR1.20@22.1,67.3
VREF: HDR1.91 R2.2 R3.1 | length 8.9
  Top Layer w0.5: R3.1@48,56.2 48,57.8 48.875,58.675 v1(50.47,58.674) 50.5,58.644 R2.2@50.5,56.2
  Bottom Layer w0.2: v1@50.47,58.852 50.9,59.282 HDR1.91@50.9,60.5
  Bottom Layer w0.23: v1(50.47,58.674) v1@50.47,58.852
pads on no net: HDR1.56 HDR1.MH1 HDR1.MH2 HDR1.MH3 HDR1.MH4 HDR1.MH5 HDR1.MH6 HDR2.MH1 HDR2.MH2 HDR2.MH3 HDR2.MH4 HDR2.MH5 HDR2.MH6 U1.19 U1.20 U1.21 U1.24 U1.32 U1.37 U1.162 U1.239 U1.240 U1.FID1 U1.FID2 U2.1

## Polygon pours and split planes (outlines as drawn)
GND on Top Layer "Top Layer-GND" (solid, remove dead copper, pour order 1000): 0,0 69,0 69,81 0,81
GND on Bottom Layer "Bottom Layer-GND" (solid, remove dead copper, pour order 1001): 0,0 69,0 69,81 0,81

## Keep-outs
Top Layer:
  lines w0.8: 0,0 69,0
Keep-Out Layer:
  lines w0.8: 0,0 0,77 cw(c34.5,-69.801) 69,77 69,0 26.5,0 26.4,-0.1 14.2,-0.1 14.1,0 0,0

## Other copper
Top Layer:
  rectangle net VCC: 41.425,28.35 43.15,47.725
  rectangle net VCC: 27.2,46.325 43.15,48.925
  rectangle net VCC: 27.45,27.175 43.15,28.95
  rectangle net VCC: 26.1,27.175 28.05,48.925
  rectangle net VCCINT: 43.725,25.875 45.225,49.875
  rectangle net VCCINT: 23.925,49.45 45.2,51.15
  rectangle net VCCINT: 25.475,25.25 45.225,26.675
  rectangle net VCCINT: 23.925,25.25 25.575,49.675

## Silkscreen, mask and mechanical layers (free items; w line width, h text height)
Bottom Overlay:
  drawing of 850 lines, arcs and shapes, not listed
  text "REV 1.02" at 47.6,76.5 h1.3
  text "NBP2" at 54.5,76.5 h1.3
  text "1" at 13.97,58.42 h1
  text "1" at 14.224,7.62 h1
PCB Boundary:
  the board outline again, w0.25
  text "PCB boundary coincides with centre-line of tracks" at 0,-12 h0.75
Gerber ID:
  text ".Layer_Name" at 0,-6 h0.75
Printout ID:
  text ".Printout_Name" at 0,-10 h0.75
Drill Drawing:
  text ".Legend" at 0,-8 h0.75